# Altium PCB PCB01.PcbDoc
Units mil, origin at the board's own origin, x right, y up, seen from the top; angles counter-clockwise.
Board outline 3937.01 x 3937.01 mil, 2 copper layers (Top Layer, Bottom Layer), stack 65.748 mil thick; 6 components, 2 nets, 6 pads, 0 vias.
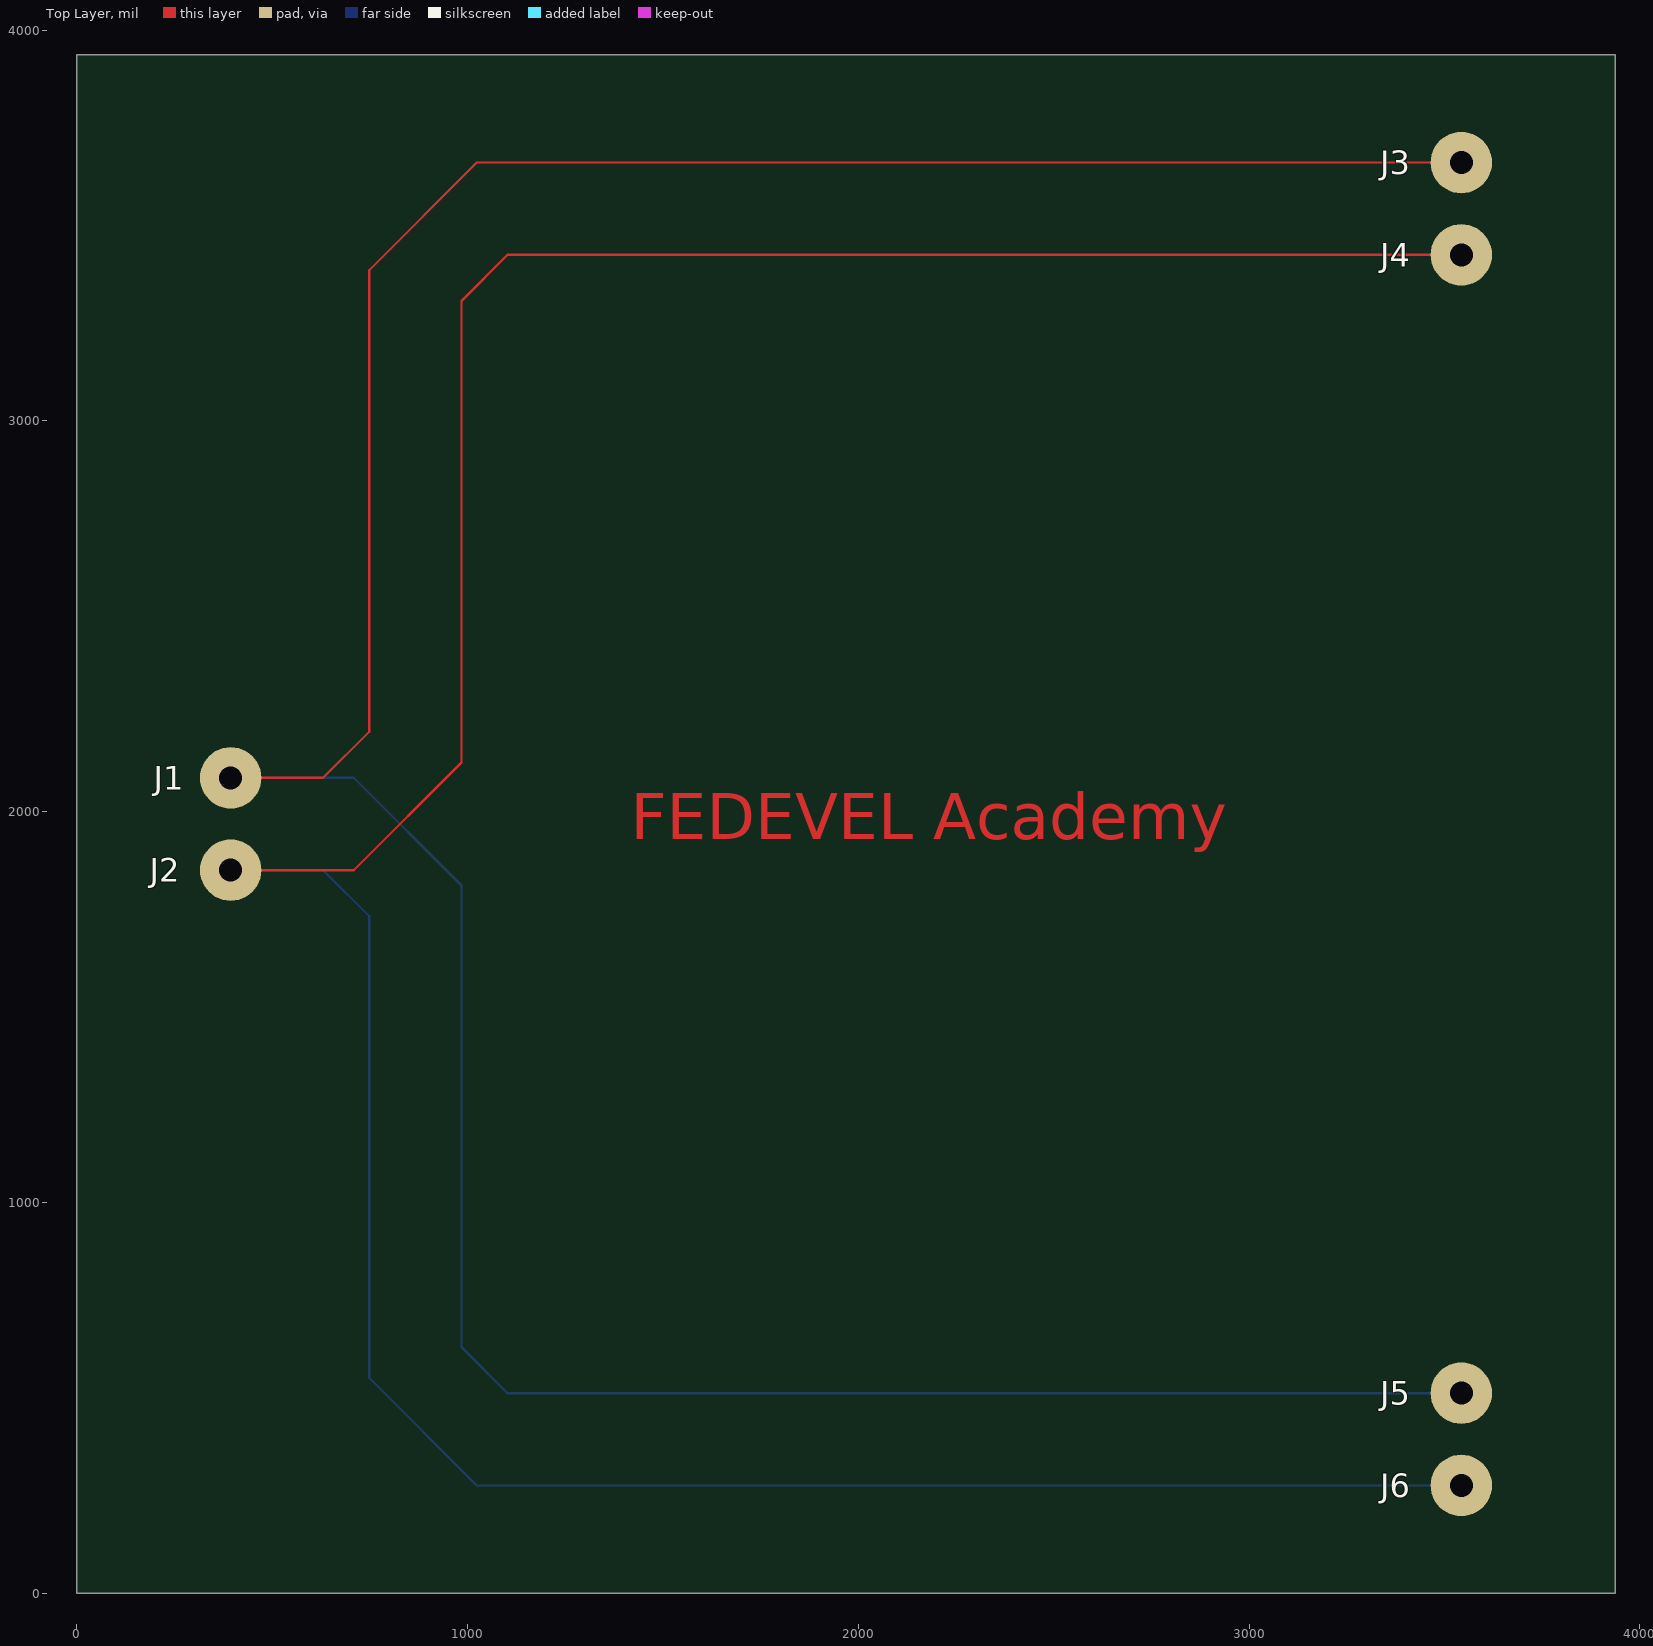
[diagram p0: Top Layer view]
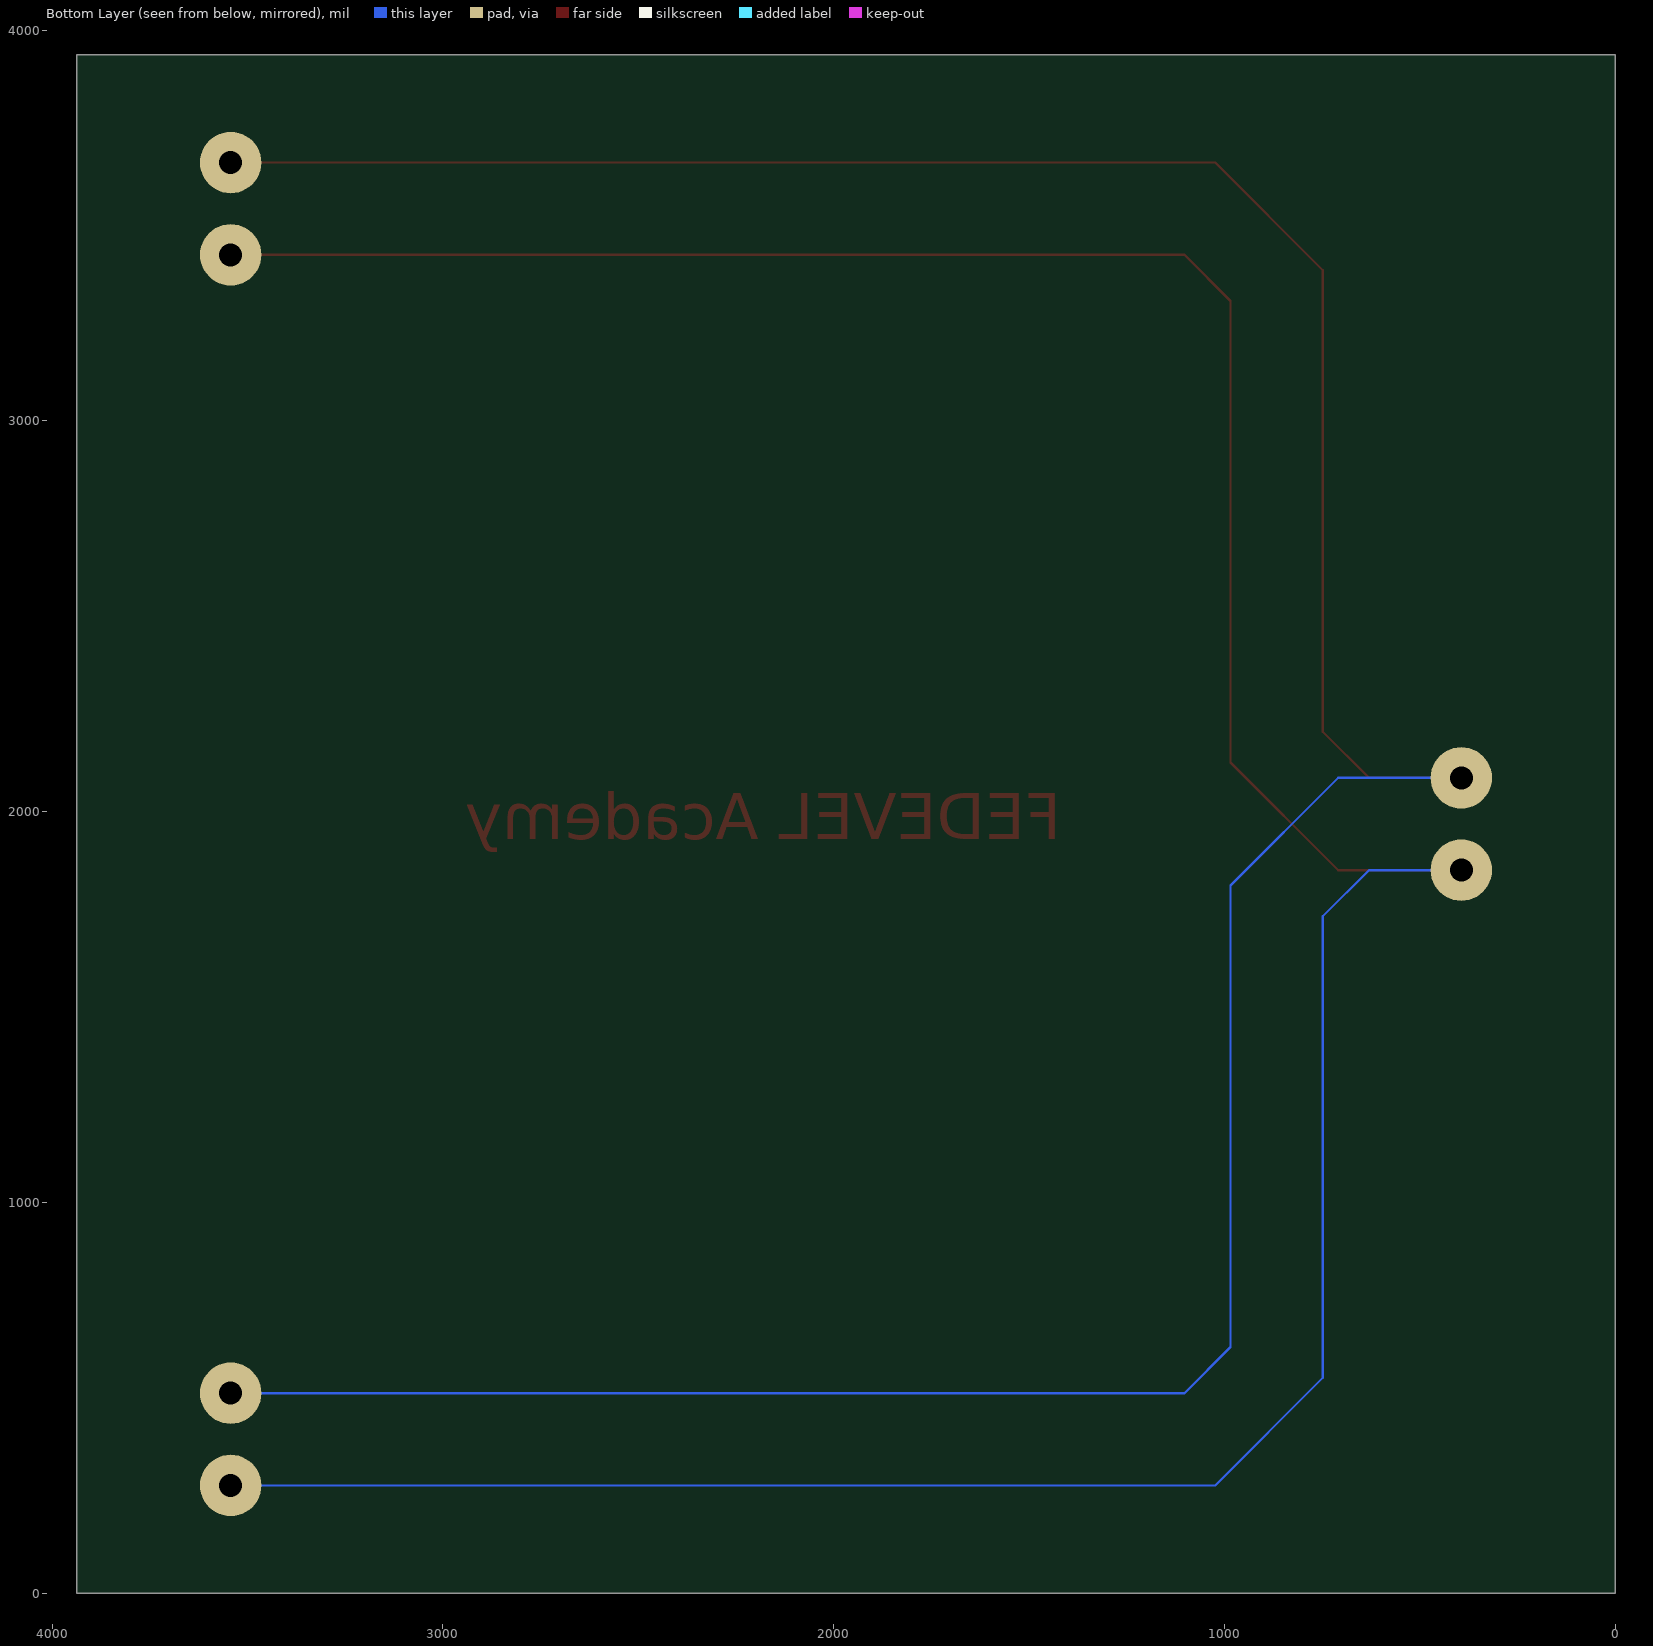
[diagram p1: Bottom Layer view, seen from below]

## Layer stack, top to bottom
Top Solder: solder mask 1, SM-001, Dk 4
Top Layer: signal copper 1.378
Dielectric 1: core 62.9921, Core-043, Dk 4.5
Bottom Layer: signal copper 1.378
Bottom Solder: solder mask 1, SM-001, Dk 4

## Board outline
0,0 3937.01,0 3937.01,3937.01 0,3937.01

## Design rules (kind name [scope] priority, off if disabled: settings)
Clearance [All] p1: gap=5.91 ignorepadtopadclearanceinfootprint=FALSE
PlaneConnect [All] p1: planeconnectstyle=Direct reliefexpansion=20 reliefentries=4 reliefconductorwidth=10 reliefairgap=10
PolygonConnect [All] p1: connectstyle=Direct reliefconductorwidth=10 reliefentries=4 polygonreliefangle="90 Angle" airgapwidth=10
RoutingVias [All] p1: holewidth=11.81 width=23.62 viastyle="Through Hole" minholewidth=11.81 minwidth=23.62 maxholewidth=11.81 maxwidth=23.62
SolderMaskExpansion [All] p1: expansion=4 istentingtop=FALSE
Width [All] p1: maxlimit=5.91 minlimit=5.91 preferedwidth=5.91
29 further rules are at their usual default settings.

## Components (designator, comment, footprint, x,y, rotation, side; value= is the part's Value field where it differs from the comment)
J1 "4MMx1.5MM" PAD_WITH_HOLE_4MMx1MM5 393.7,2086.61 r0 top
J2 "4MMx1.5MM" PAD_WITH_HOLE_4MMx1MM5 393.7,1850.39 r0 top
J3 "4MMx1.5MM" PAD_WITH_HOLE_4MMx1MM5 3543.31,3661.42 r0 top
J4 "4MMx1.5MM" PAD_WITH_HOLE_4MMx1MM5 3543.31,3425.2 r0 top
J5 "4MMx1.5MM" PAD_WITH_HOLE_4MMx1MM5 3543.31,511.81 r0 top
J6 "4MMx1.5MM" PAD_WITH_HOLE_4MMx1MM5 3543.31,275.59 r0 top

## Footprints (in the part's own frame and the unit in brackets; to place one, negate y for a bottom-side part, rotate by r counter-clockwise, add the part's x,y. Pads: shape width x height; smd on the part's side, far side on the other; paste and mask are expansions set on the pad)
PAD_WITH_HOLE_4MMx1MM5 [mm]
  round 4 hole 1.5: 1(0,0)

## Part data
J1 J2 J3 J4 J5 J6: library part PAD_WITH_HOLE_4MMx1MM5, "Pad with a hole 4mm x 1.5mm"

## Nets (pads, with @x,y where several pads share a name; then routed paths per layer and width w, separated by ;. In a path a pad name is that pad's centre, name@x,y a point inside that pad or via, vN(x,y) a via of type N, cw(c..) or ccw(c..) an arc to the next point about the centre after c; other vN are vias at no path point)
+VCC: J1.1 J3.1 J5.1 | length 8987.6
  Top Layer w5.91: J1.1 629.92,2086.61 748.03,2204.72 748.03,3385.83 1023.62,3661.42 J3.1
  Bottom Layer w5.91: J1.1 708.66,2086.61 984.25,1811.02 984.25,629.92 1102.36,511.81 J5.1
GND: J2.1 J4.1 J6.1 | length 8987.6
  Top Layer w5.91: J2.1 708.66,1850.39 984.25,2125.98 984.25,3307.09 1102.36,3425.2 J4.1
  Bottom Layer w5.91: J2.1 629.92,1850.39 748.03,1732.28 748.03,551.18 1023.62,275.59 J6.1

## Other copper
Top Layer:
  text "FEDEVEL Academy" at 1417.6,1929.15 h118.11

## Silkscreen, mask and mechanical layers (free items; w line width, h text height)
Top Solder:
  rectangle: 1338.58,1850.39 3228.35,2125.98
Board:
  the board outline again, w23.62